# Allegro board my_demob2.brd
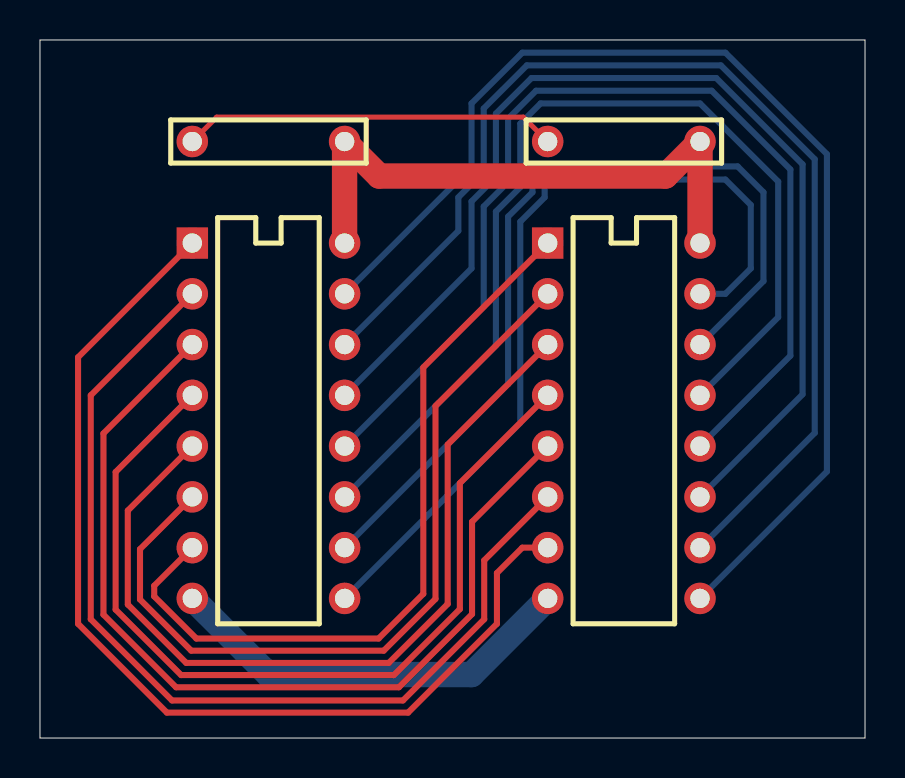
[diagram p0: board, top side]
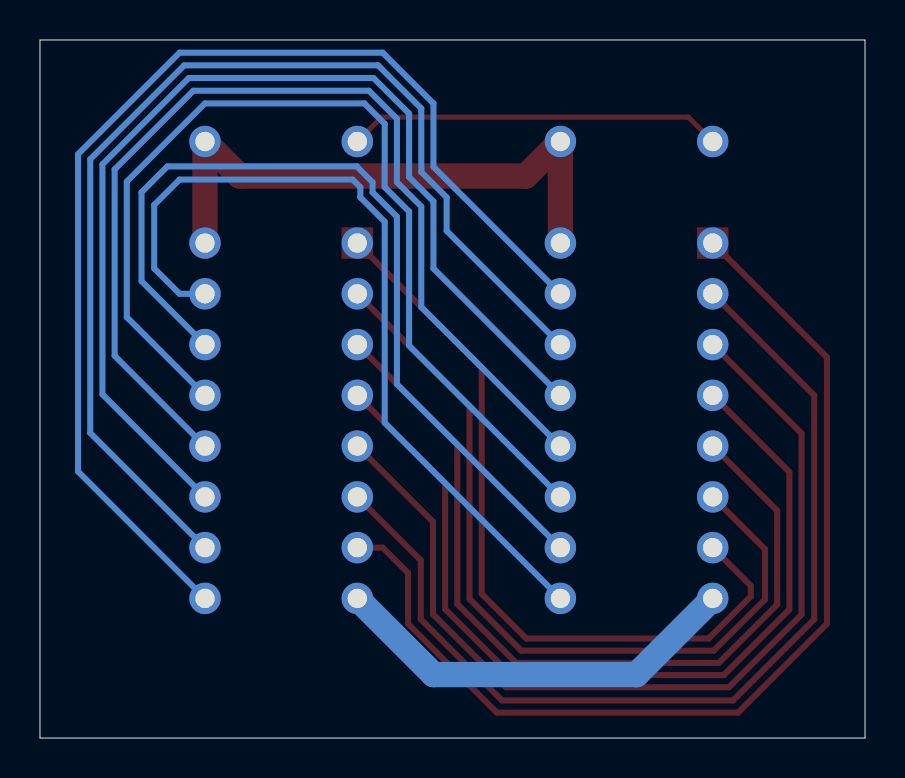
[diagram p1: board, bottom side, seen from below]

Outline 41.27 x 34.93 mm; copper layers: TOP, GND, POWER, INNER1, INNER2, BOTTOM. Coordinates in mm from the lower left corner of the outline.
Outline path: 0,34.93 41.27,34.93 41.27,0 0,0 0,34.93

## Design rules (mm)
nets with their own width: min track width 0.254; nets GND_SIGNAL
nets with their own width: min track width 0.305; nets N01899 N01900 N01901 N01902 N01903 N01904 N01905 N01906 N01907 N01908 N01909 N01910 N01911 N01912
nets with their own width: min track width 1.27; nets GND VCC

## Placement (name value [footprint] x y rotation side)
C1  CAP NP  [AC300100A]  15.24 29.85 180 top
C2  CAP NP  [AC300100A]  33.02 29.85 180 top
U1  74LS158  [DIP16]  7.62 24.77 270 top
U2  74LS158  [DIP16]  25.4 24.77 270 top

## Library data of the parts
C1 C2 = CAP_NP
U1 U2 = 74LS158

## Footprints (pads in the part's own frame, mm; a bottom-side part is the same pattern mirrored in y, then rotated)
AC300100A
  round 1.575 hole 0.965: 1(0,0) 2(7.62,0)
DIP16
  rect 1.575x1.575 hole 0.965: 1(0,0)
  round 1.575 hole 0.965: 2(2.54,0) 3(5.08,0) 4(7.62,0) 5(10.16,0) 6(12.7,0) 7(15.24,0) 8(17.78,0) 9(17.78,7.62) 10(15.24,7.62) 11(12.7,7.62) 12(10.16,7.62) 13(7.62,7.62) 14(5.08,7.62) 15(2.54,7.62) 16(0,7.62)

## Nets
GND: U1.8(TP-8) U2.8(TP-8)
GND_SIGNAL: C1.2(TP-2) C2.2(TP-2)
VCC: C1.1(TP-1) C2.1(TP-1) U1.16(TP-16) U2.16(TP-16)
N01899: U1.2(TP-2) U2.6(TP-6)
N01900: U1.3(TP-3) U2.5(TP-5)
N01901: U1.4(TP-4) U2.4(TP-4)
N01902: U1.5(TP-5) U2.3(TP-3)
N01903: U1.6(TP-6) U2.2(TP-2)
N01904: U1.7(TP-7) U2.1(TP-1)
N01905: U1.9(TP-9) U2.15(TP-15)
N01906: U1.10(TP-10) U2.14(TP-14)
N01907: U1.11(TP-11) U2.13(TP-13)
N01908: U1.12(TP-12) U2.12(TP-12)
N01909: U1.14(TP-14) U2.10(TP-10)
N01910: U1.1(TP-1) U2.7(TP-7)
N01911: U1.13(TP-13) U2.11(TP-11)
N01912: U1.15(TP-15) U2.9(TP-9)

## Routing (per net, layer and track width the routed paths; a pad name or vN(x,y) marks a point on that pad's centre or on a via; arc(x,y) is an arc through that point)
GND: length 20.9
  BOTTOM w1.27: U2.8 21.59,3.17 11.43,3.17 U1.8
GND_SIGNAL: length 18.8
  TOP w0.254: C1.2 8.84,31.06 24.18,31.06 C2.2
VCC: length 29.4
  TOP w1.27: U1.16 C1.1 16.97,28.12 31.29,28.12 C2.1 U2.16
N01899: length 48.9
  TOP w0.305: U2.6 22.23,8.89 22.23,5.94 18.16,1.88 6.6,1.88 2.54,5.94 2.54,17.14 U1.2
N01900: length 46.8
  TOP w0.305: U1.3 3.17,15.24 3.17,6.17 6.81,2.54 17.96,2.54 21.62,6.2 21.62,10.82 U2.5
N01901: length 44.8
  TOP w0.305: U2.4 21.01,12.75 21.01,6.45 17.7,3.15 7.06,3.15 3.78,6.43 3.78,13.31 U1.4
N01902: length 42.7
  TOP w0.305: U1.5 4.39,11.38 4.39,6.68 7.32,3.76 17.45,3.76 20.4,6.71 20.4,14.68 U2.3
N01903: length 40.7
  TOP w0.305: U2.2 19.79,16.61 19.79,6.96 17.2,4.37 7.57,4.37 5,6.93 5,9.45 U1.6
N01904: length 38.6
  TOP w0.305: U1.7 5.71,7.62 5.71,7.09 7.82,4.98 16.94,4.98 19.18,7.21 19.18,18.54 U2.1
N01905: length 42
  BOTTOM w0.305: U2.15 34.29,22.22 35.56,23.5 35.56,26.67 34.29,27.94 25.63,27.94 25.25,27.56 25.25,27.05 24.03,25.83 24.03,15.77 U1.9
N01906: length 43.5
  BOTTOM w0.305: U1.10 23.42,17.7 23.42,26.09 24.64,27.3 24.64,27.81 25.43,28.6 34.9,28.6 36.2,27.3 36.2,22.86 U2.14
N01907: length 49.6
  BOTTOM w0.305: U2.13 36.93,21.06 36.93,27.84 33.02,31.75 25.04,31.75 24.03,30.73 24.03,27.56 22.81,26.34 22.81,19.63 U1.11
N01908: length 51.8
  BOTTOM w0.305: U1.12 22.2,21.56 22.2,26.59 23.42,27.81 23.42,30.99 24.82,32.39 33.6,32.39 37.54,28.45 37.54,19.13 U2.12
N01909: length 55.9
  BOTTOM w0.305: U1.14 20.93,25.37 20.93,27.05 22.2,28.32 22.2,31.5 24.36,33.66 34.06,33.66 38.76,28.96 38.76,15.27 U2.10
N01910: length 51.7
  TOP w0.305: U1.1 1.91,19.05 1.91,5.72 6.35,1.27 18.41,1.27 22.86,5.72 22.86,8.25 24.13,9.52 U2.7
N01911: length 53.9
  BOTTOM w0.305: U2.11 38.15,17.2 38.15,28.7 33.83,33.02 24.59,33.02 22.81,31.24 22.81,28.07 21.59,26.85 21.59,23.5 U1.13
N01912: length 57.9
  BOTTOM w0.305: U1.15 21.59,28.57 21.59,31.75 24.13,34.29 34.29,34.29 39.37,29.21 39.37,13.34 U2.9
